# Altium PCB Circuito de aplicación Ej4.PcbDoc
Units mm, origin at the board's own origin, x right, y up, seen from the top; angles counter-clockwise.
Board outline 50 x 50 mm, 2 copper layers (Top Layer, Bottom Layer); 11 components, 10 nets, 33 pads, 1 vias.
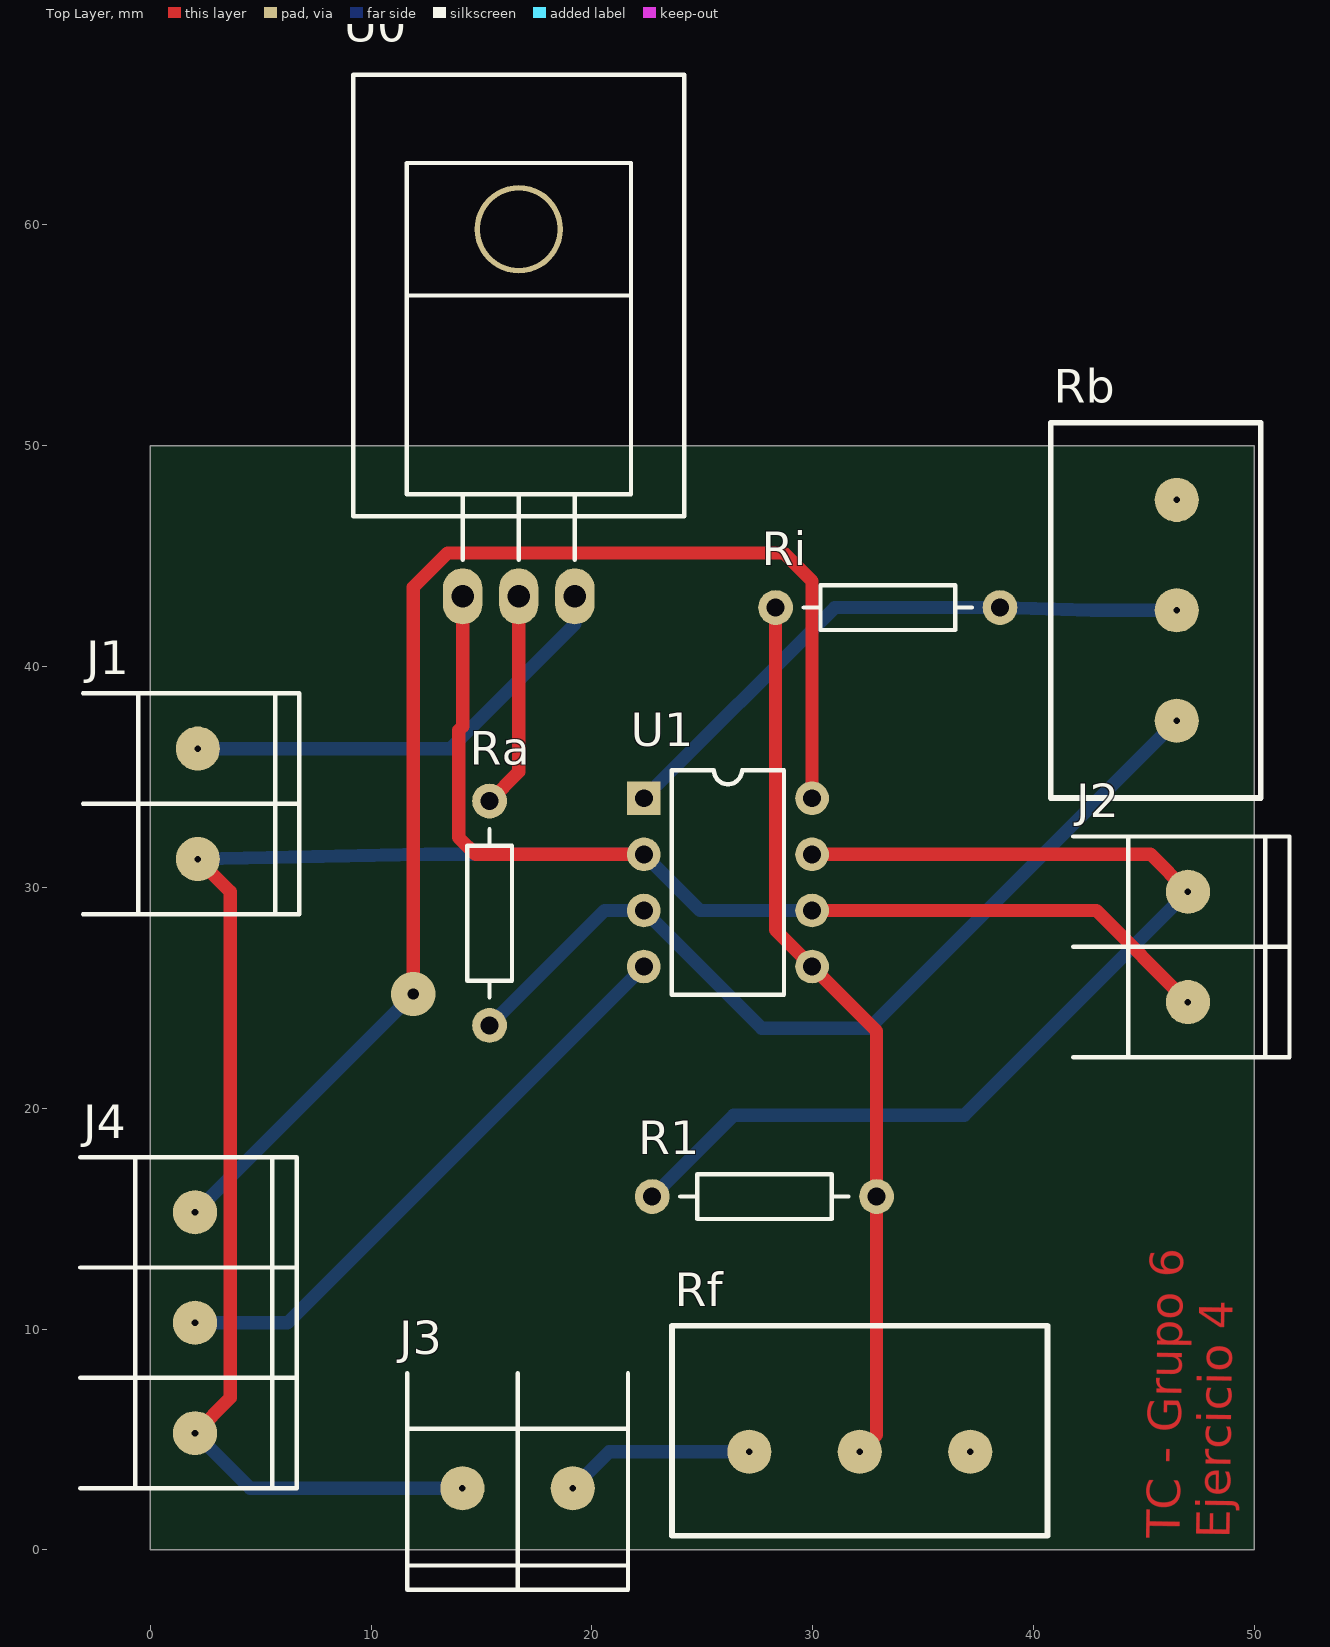
[diagram p0: Top Layer view]
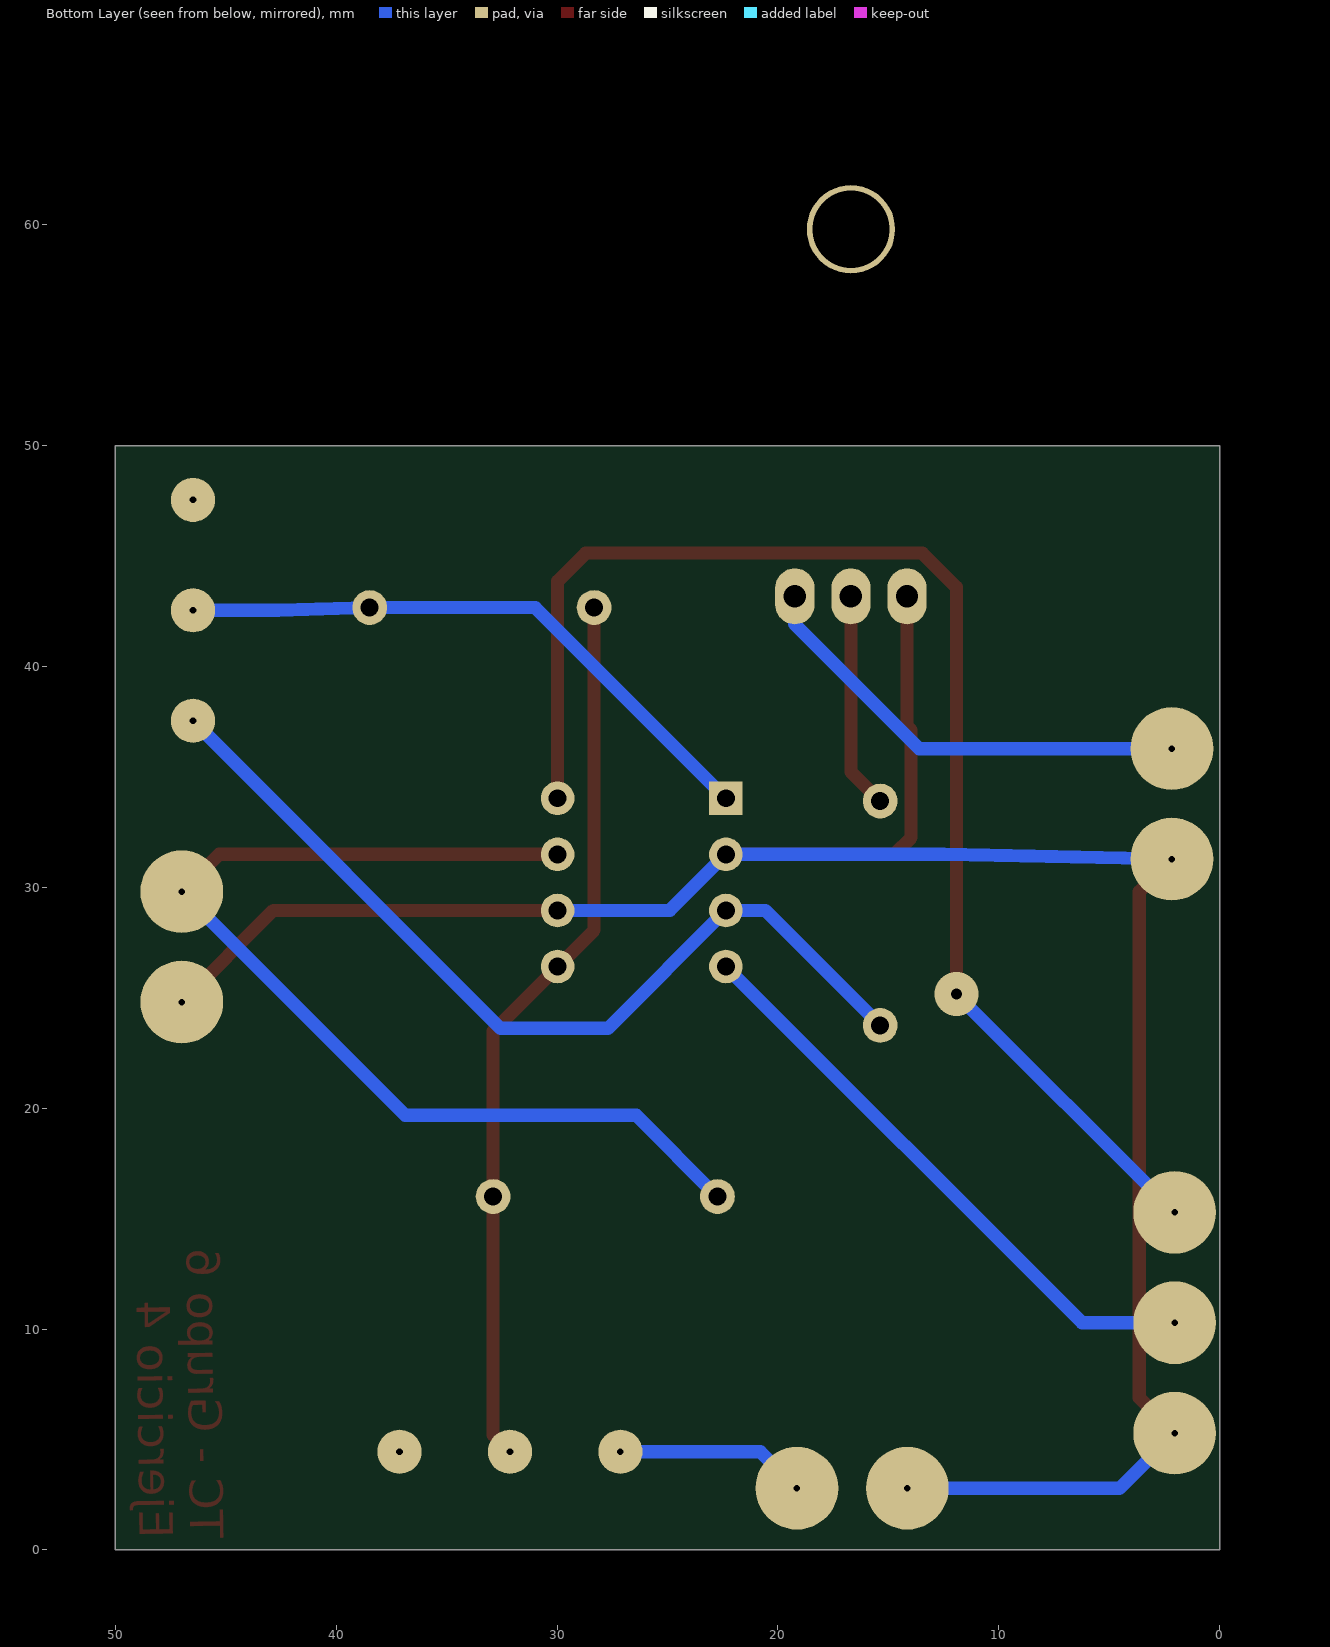
[diagram p1: Bottom Layer view, seen from below]
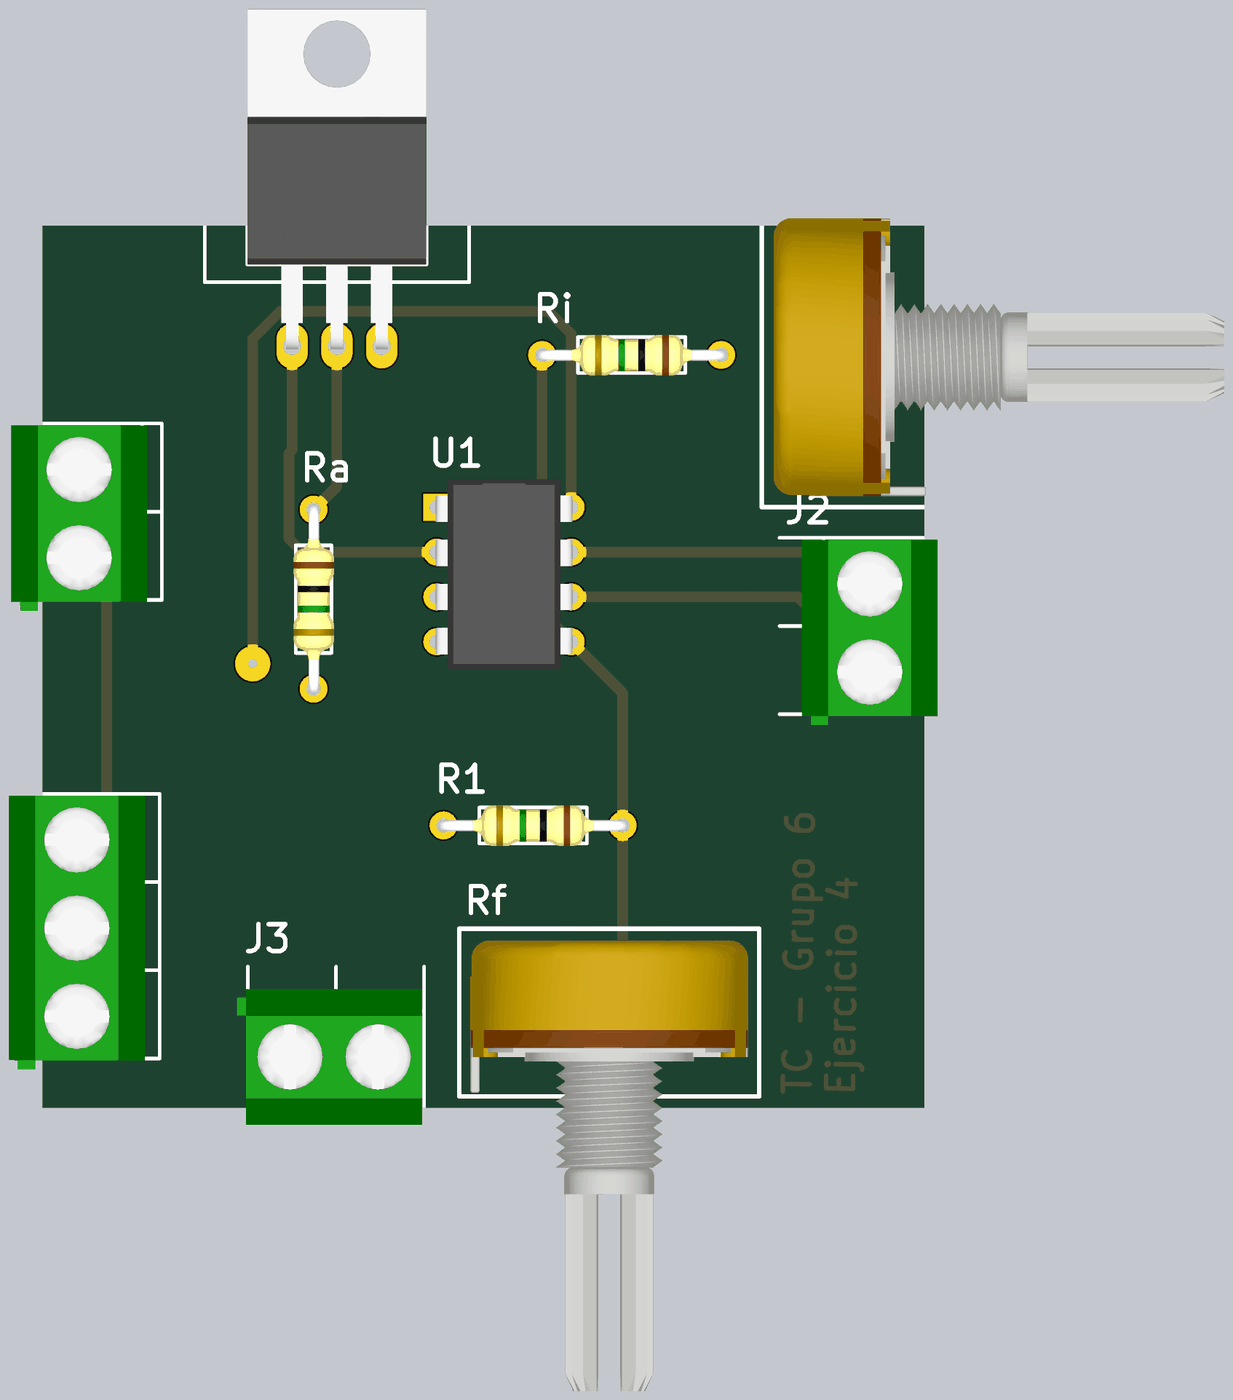
[diagram p2: 3D render of the assembled board from above, using the file's embedded part models]

## Layer stack, top to bottom
Top Solder: solder mask 0.0102, Solder Resist, Dk 3.5
Top Layer: signal copper 0.0356
Dielectric 1: dielectric 0.32, FR-4, Dk 4.8
Bottom Layer: signal copper 0.0356
Bottom Solder: solder mask 0.0102, Solder Resist, Dk 3.5

## Board outline
0,0 50,0 50,50 0,50

## Design rules (kind name [scope] priority, off if disabled: settings)
Clearance [All] p1: gap=0.3 ignorepadtopadclearanceinfootprint=FALSE
PolygonConnect [All] p1: connectstyle=Relief reliefconductorwidth=0.254 reliefentries=4 polygonreliefangle="90 Angle" airgapwidth=0.254
RoutingVias [All] p1: holewidth=0.5 width=2 viastyle="Through Hole" minholewidth=0.3 minwidth=2 maxholewidth=0.5 maxwidth=2
SolderMaskExpansion [All] p1: expansion=0.102
Width [All] p1: maxlimit=0.9 minlimit=0.6 preferedwidth=0.6
30 further rules are at their usual default settings.

## Components (designator, comment, footprint, x,y, rotation, side; value= is the part's Value field where it differs from the comment)
J1 "BORNERA 2" BORNERA2 2.159,33.782 r180 top
J2 "BORNERA 2" BORNERA2 46.99,27.305 r180 top
J3 "BORNERA 2" BORNERA2 16.637,2.794 r90 top
J4 "BORNERA 3" BORNERA3 2.032,10.287 r180 top
R1 "RES" RES400 32.893,16.002 r180 top
Ra "RES" RES400 15.367,33.909 r270 top
Rb "POTENCIOMETRO" POTENCIOMETRO 46.482,42.545 r90 top
Rf "POTENCIOMETRO" POTENCIOMETRO 32.131,4.445 r0 top
Ri "RES" RES400 38.481,42.672 r180 top
U0 "LM35" "TO-220 H - DISIPADOR" 16.764,54.229 r0 top
U1 "LM833" DIP8 22.352,34.036 r0 top

## Footprints (in the part's own frame and the unit in brackets; to place one, negate y for a bottom-side part, rotate by r counter-clockwise, add the part's x,y. Pads: shape width x height; smd on the part's side, far side on the other; paste and mask are expansions set on the pad)
BORNERA2 [mm] "Bornera con Tornillos 5mm separación"
  round 2 / inner round 3.75 / far side round 3.75 hole 0.3: 1(0,2.5) 2(0,-2.5)
  silkscreen extent -4.6,-5 5.2,5, body extent -3.76,-4.89 3.94,5.61, height 10
BORNERA3 [mm] "Bornera con Tornillos 5mm separación"
  round 2 / inner round 3.75 / far side round 3.75 hole 0.3: 1(0,5) 2(0,0) 3(0,-5)
  silkscreen extent -4.6,-7.5 5.2,7.5, body extent -3.76,-7.39 3.94,8.11, height 10.05
DIP8 [mil]
  rect 60x60 hole 32: 1(0,0)
  round 60 hole 32: 2(0,-100) 3(0,-200) 4(0,-300) 5(300,-300) 6(300,-200) 7(300,-100) 8(300,0)
  silkscreen extent 50,-350 250,50, body extent -3,-363 303,63, height 177
POTENCIOMETRO [mm]
  round 2 hole 0.3: 1(-5,0) 2(0,0) 3(5,0)
  silkscreen extent -8.5,-3.8 8.5,5.7, body extent -7.87,-20.53 7.87,5.03, height 20.12
RES400 [mil]
  round 62 hole 32: 1(0,0) 2(400,0)
  silkscreen extent 50,-40 350,40, body extent -12,-45 412,46, height 96
"TO-220 H - DISIPADOR" [mil]
  oval 70x100 hole 40: 1(-102.87,-435) 2(-2.87,-435) 3(97.13,-435)
  round 157.48 hole 137.8: 4(-2.87,219.33)
  Top Layer pour cut-out: -325.08,-324.13 319.02,-324.13 319.61,524.29 -325.08,524.29
  silkscreen extent -298,-370 292,495, body extent -203,-443 197,317, height 175

## Part data
U0: library part LM317, "IC REG ADJ 1.5A 3 TERM TO-220"
U1: "Dual Audio Operational Amplifier"

## Via types
v1: diameter 2, hole 0.5, Top Layer to Bottom Layer, 1 vias

## Nets (pads, with @x,y where several pads share a name; then routed paths per layer and width w, separated by ;. In a path a pad name is that pad's centre, name@x,y a point inside that pad or via, vN(x,y) a via of type N, cw(c..) or ccw(c..) an arc to the next point about the centre after c; other vN are vias at no path point)
GND: J1.1 J2.1 J3.1 J4.1 U0.1 U1.2 U1.6 | length 107.7
  Top Layer w0.6: J4.1 3.632,6.887 3.632,29.809 J1.1 ; U0.1 14.151,37.29 13.97,37.109 13.97,32.258 14.732,31.496 U1.2 ; U1.6 42.839,28.956 J2.1
  Bottom Layer w0.6: J4.1 4.525,2.794 J3.1 ; J1.1 12.482,31.496 U1.2 24.892,28.956 U1.6
NetR1_1: R1.1 Rf.2 Ri.2 U1.5 | length 40.4
  Top Layer w0.6: Ri.2 28.321,28.067 U1.5 32.893,23.495 R1.1 32.893,5.207 Rf.2
NetRa_1: Ra.1 U0.2 | length 9.8
  Top Layer w0.6: Ra.1 16.691,35.233 U0.2
NetRa_2: Ra.2 Rb.1 U1.3 | length 41.2
  Bottom Layer w0.6: Ra.2 20.574,28.956 U1.3 27.686,23.622 32.559,23.622 Rb.1
NetRb_2: Rb.2 Ri.1 U1.1 | length 27.7
  Bottom Layer w0.6: U1.1 30.988,42.672 Ri.1 42.621,42.545 Rb.2
Vcc+: J4.3 U1.8 | length 61.4
  Top Layer w0.6: v1(11.913,25.168) 11.913,43.586 13.462,45.136 28.702,45.136 29.972,43.866 U1.8
  Bottom Layer w0.6: J4.3 v1(11.913,25.168)
Vcc-: J4.2 U1.4 | length 27
  Bottom Layer w0.6: J4.2 6.223,10.287 U1.4
Vf: J3.2 Rf.1 | length 8.7
  Bottom Layer w0.6: J3.2 20.788,4.445 Rf.1
Vin: J1.2 U0.3 | length 20.7
  Bottom Layer w0.6: J1.2 13.592,36.282 19.231,41.921 U0.3
Vout: J2.2 R1.2 U1.7 | length 47.7
  Top Layer w0.6: U1.7 38.06,31.496 45.299,31.496 J2.2
  Bottom Layer w0.6: R1.2 26.416,19.685 36.87,19.685 J2.2
pads on no net: Rb.3 Rf.3 U0.4

## Other copper
Top Layer:
  text "TC - Grupo 6 / Ejercicio 4" at 48.895,0.508 h1.52 r89.26